# Altium PCB Advanced Clock.PcbDoc (part 4 of 7)
Units mil, origin at the board's own origin, x right, y up, seen from the top; angles counter-clockwise.
Board outline 3854 x 3880 mil, 2 copper layers (Top Layer, Bottom Layer); 117 components, 90 nets, 504 pads, 209 vias.
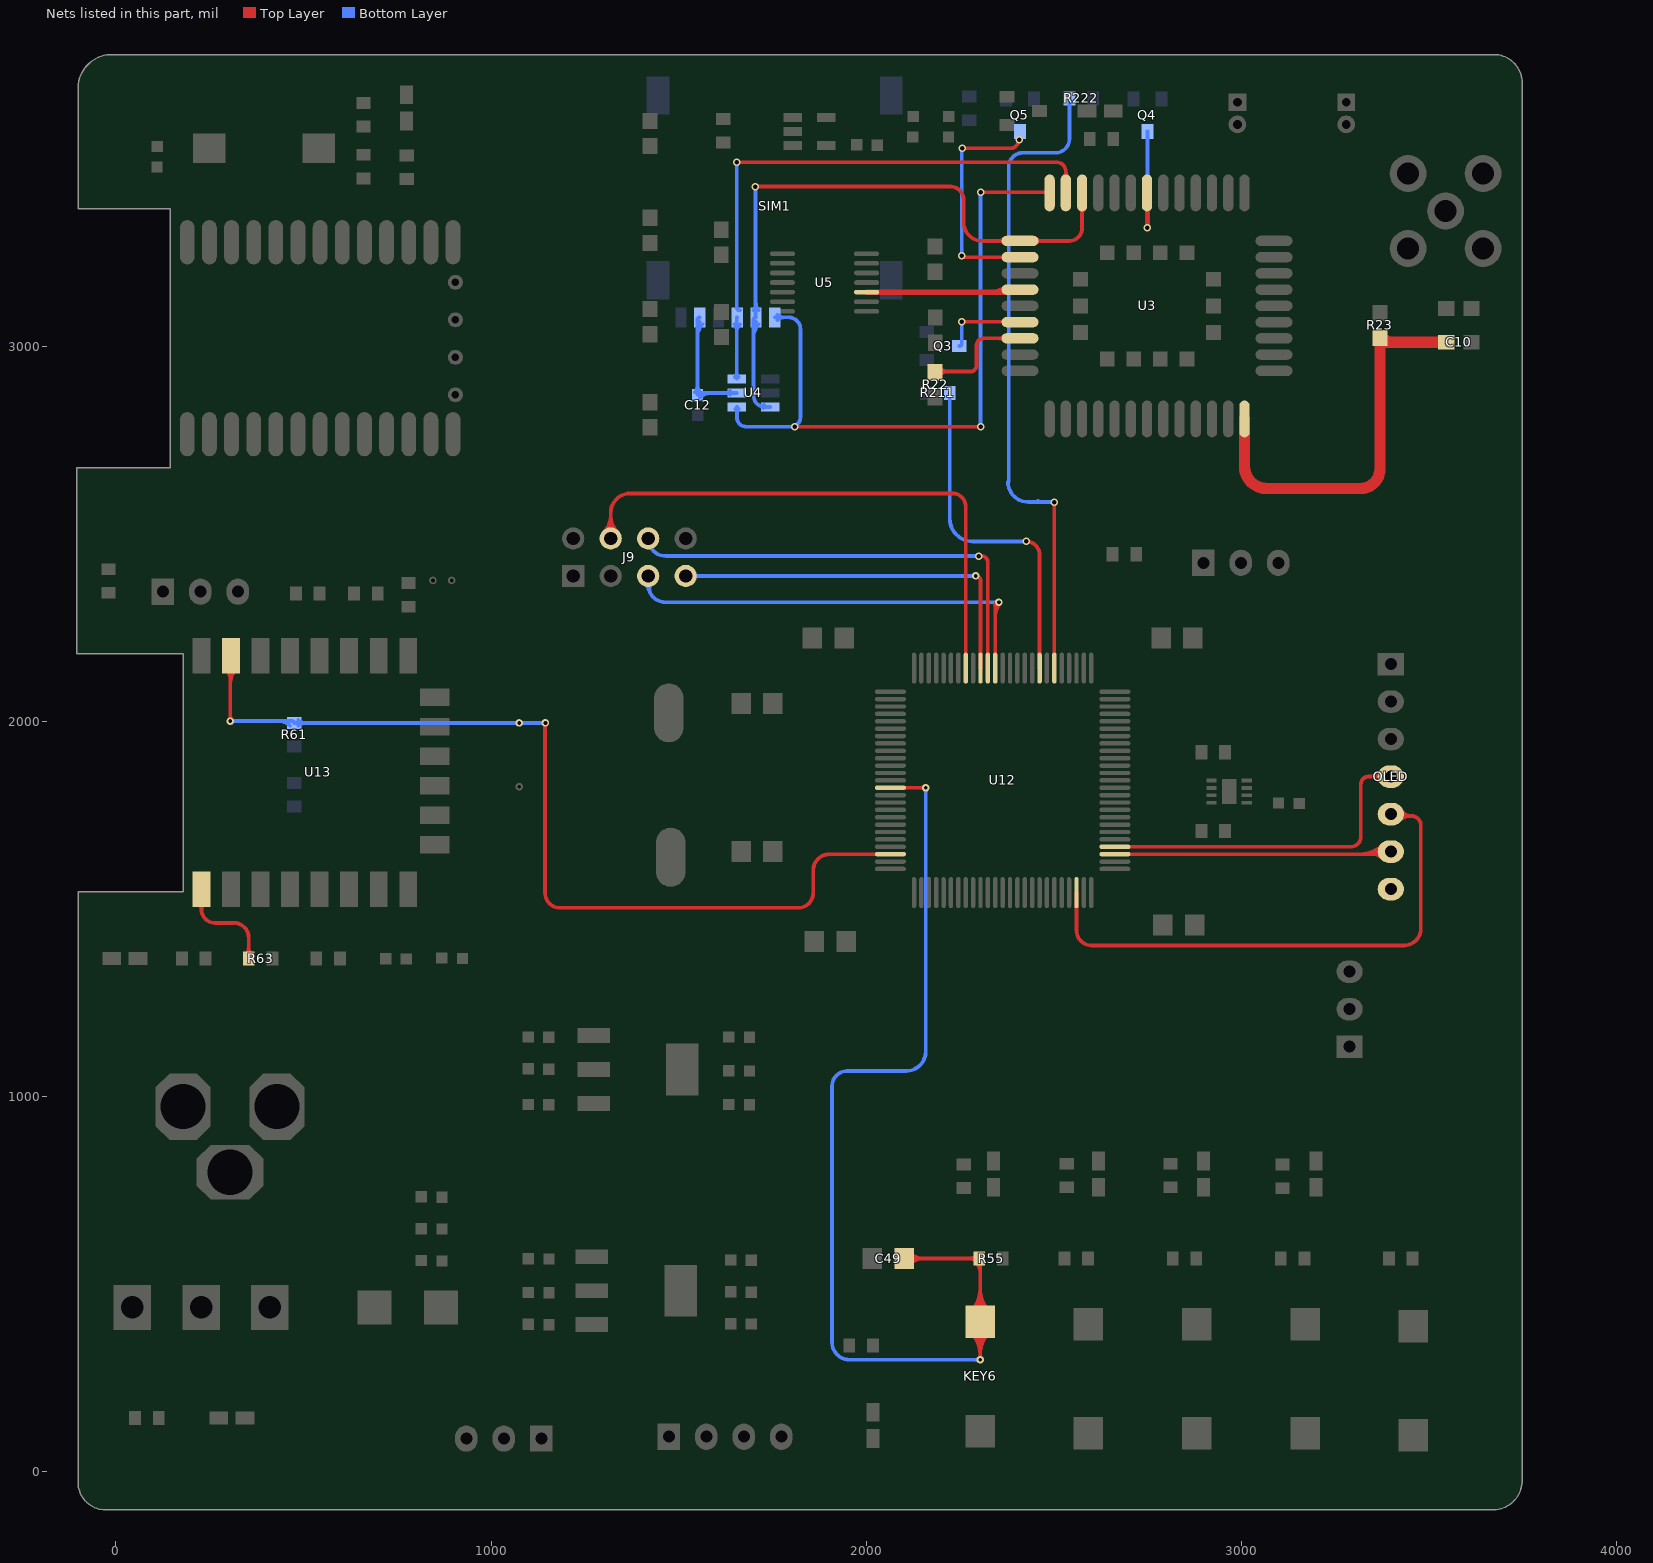
[diagram p4: the nets of this part, all layers, seen from the top]

## Via types
v1: diameter 20, hole 12, Top Layer to Bottom Layer, 133 vias
v2: diameter 20, hole 10, Top Layer to Bottom Layer, 30 vias
v3: diameter 15, hole 7, Top Layer to Bottom Layer, 26 vias
v4: diameter 30, hole 20, Top Layer to Bottom Layer, 11 vias
v5: diameter 138, hole 137.8, Top Layer to Bottom Layer, 4 vias
v6: diameter 50, hole 30, Top Layer to Bottom Layer, 4 vias
v7: diameter 40, hole 20, Top Layer to Bottom Layer, 1 vias

## Nets (pads, with @x,y where several pads share a name; then routed paths per layer and width w, separated by ;. In a path a pad name is that pad's centre, name@x,y a point inside that pad or via, vN(x,y) a via of type N, cw(c..) or ccw(c..) an arc to the next point about the centre after c; other vN are vias at no path point) (continued)
NRST: C49.2 KEY6.2 R55.1 U12.14 | length 6317
  Top Layer w10: U12.14@2064.79,1822.32 2159,1822.32 v2(2159,1822) ; C49.2@2101.5,567 R55.1@2301.5,567 ; v2(2304,297) KEY6.2@2304,398.34 R55.1@2304,564.5 ; C49.2@2109.28,559.22 cw(c2128.06,540.44) 2128.06,567 ; C49.2@2109.28,559.22 cw(c2128.06,540.44) 2128.06,567 ; C49.2@2109.28,559.22 cw(c2128.06,540.44) 2128.06,567 ; C49.2@2109.28,559.22 cw(c2128.06,540.44) 2128.06,567 ; C49.2@2109.28,559.22 cw(c2128.06,540.44) 2128.06,567 ; C49.2@2109.28,574.78 ccw(c2128.06,593.56) 2128.06,567 ; C49.2@2109.28,574.78 ccw(c2128.06,593.56) 2128.06,567 ; C49.2@2109.28,574.78 ccw(c2128.06,593.56) 2128.06,567 ; C49.2@2109.28,574.78 ccw(c2128.06,593.56) 2128.06,567 ; C49.2@2109.28,574.78 ccw(c2128.06,593.56) 2128.06,567 ; C49.2@2116.35,552.15 cw(c2152.2,516.3) 2152.2,567 ; C49.2@2116.35,552.15 cw(c2152.2,516.3) 2152.2,567 ; C49.2@2116.35,552.15 cw(c2152.2,516.3) 2152.2,567 ; C49.2@2116.35,552.15 cw(c2152.2,516.3) 2152.2,567 ; C49.2@2116.35,552.15 cw(c2152.2,516.3) 2152.2,567 ; C49.2@2116.35,581.85 ccw(c2152.2,617.7) 2152.2,567 ; C49.2@2116.35,581.85 ccw(c2152.2,617.7) 2152.2,567 ; C49.2@2116.35,581.85 ccw(c2152.2,617.7) 2152.2,567 ; C49.2@2116.35,581.85 ccw(c2152.2,617.7) 2152.2,567 ; C49.2@2116.35,581.85 ccw(c2152.2,617.7) 2152.2,567 ; 2146.17,1822.32 cw(c2146.17,1809.17) v2@2155.46,1818.46 ; 2146.17,1822.32 cw(c2146.17,1809.17) v2@2155.46,1818.46 ; 2146.17,1822.32 cw(c2146.17,1809.17) v2@2155.46,1818.46 ; 2146.17,1822.32 cw(c2146.17,1809.17) v2@2155.46,1818.46 ; 2146.17,1822.32 cw(c2146.17,1809.17) v2@2155.46,1818.46 ; 2146.17,1822.32 cw(c2146.17,1809.17) v2@2155.46,1818.46 ; 2146.17,1822.32 cw(c2146.17,1809.17) v2@2155.46,1818.46 ; 2146.17,1822.32 cw(c2146.17,1809.17) v2@2155.46,1818.46 ; 2147.69,1822.31 ccw(c2147.69,1833.31) v2@2155.46,1825.54 ; 2147.69,1822.31 ccw(c2147.69,1833.31) v2@2155.46,1825.54 ; 2147.69,1822.31 ccw(c2147.69,1833.31) v2@2155.46,1825.54 ; 2147.69,1822.31 ccw(c2147.69,1833.31) v2@2155.46,1825.54 ; 2147.69,1822.31 ccw(c2147.69,1833.31) v2@2155.46,1825.54 ; 2147.69,1822.31 ccw(c2147.69,1833.31) v2@2155.46,1825.54 ; 2147.69,1822.31 ccw(c2147.69,1833.31) v2@2155.46,1825.54 ; 2147.69,1822.31 ccw(c2147.69,1833.31) v2@2155.46,1825.54 ; 2275.55,567 cw(c2275.55,541.05) R55.1@2293.9,559.4 ; 2275.55,567 ccw(c2275.55,592.95) R55.1@2293.9,574.6 ; 2275.55,567 cw(c2275.55,541.05) R55.1@2293.9,559.4 ; 2275.55,567 ccw(c2275.55,592.95) R55.1@2293.9,574.6 ; 2275.55,567 cw(c2275.55,541.05) R55.1@2293.9,559.4 ; 2275.55,567 ccw(c2275.55,592.95) R55.1@2293.9,574.6 ; KEY6.2@2279.7,370.1 cw(c2221.02,311.42) 2304,311.42 ; KEY6.2@2279.7,370.1 cw(c2221.02,311.42) 2304,311.42 ; KEY6.2@2279.7,370.1 cw(c2221.02,311.42) 2304,311.42 ; KEY6.2@2279.7,370.1 cw(c2221.02,311.42) 2304,311.42 ; KEY6.2@2279.7,370.1 cw(c2221.02,311.42) 2304,311.42 ; KEY6.2@2279.7,426.58 ccw(c2221.02,485.25) 2304,485.25 ; KEY6.2@2279.7,426.58 ccw(c2221.02,485.25) 2304,485.25 ; KEY6.2@2279.7,426.58 ccw(c2221.02,485.25) 2304,485.25 ; KEY6.2@2279.7,426.58 ccw(c2221.02,485.25) 2304,485.25 ; KEY6.2@2279.7,426.58 ccw(c2221.02,485.25) 2304,485.25 ; KEY6.2@2286.77,377.17 cw(c2245.17,335.57) 2304,335.57 ; KEY6.2@2286.77,377.17 cw(c2245.17,335.57) 2304,335.57 ; KEY6.2@2286.77,377.17 cw(c2245.17,335.57) 2304,335.57 ; KEY6.2@2286.77,377.17 cw(c2245.17,335.57) 2304,335.57 ; KEY6.2@2286.77,377.17 cw(c2245.17,335.57) 2304,335.57 ; KEY6.2@2286.77,419.51 ccw(c2245.17,461.11) 2304,461.11 ; KEY6.2@2286.77,419.51 ccw(c2245.17,461.11) 2304,461.11 ; KEY6.2@2286.77,419.51 ccw(c2245.17,461.11) 2304,461.11 ; KEY6.2@2286.77,419.51 ccw(c2245.17,461.11) 2304,461.11 ; KEY6.2@2286.77,419.51 ccw(c2245.17,461.11) 2304,461.11 ; v2@2300.46,300.54 ccw(c2291.93,309.07) 2304,309.07 ; v2@2300.46,300.54 ccw(c2291.93,309.07) 2304,309.07 ; v2@2300.46,300.54 ccw(c2291.93,309.07) 2304,309.07 ; v2@2300.46,300.54 ccw(c2291.93,309.07) 2304,309.07 ; v2@2300.46,300.54 ccw(c2291.93,309.07) 2304,309.07 ; v2@2300.46,300.54 ccw(c2291.93,309.07) 2304,309.07 ; v2@2300.46,300.54 ccw(c2291.93,309.07) 2304,309.07 ; v2@2300.46,300.54 ccw(c2291.93,309.07) 2304,309.07 ; 2304,309.07 ccw(c2316.07,309.07) v2@2307.54,300.54 ; 2304,309.07 ccw(c2316.07,309.07) v2@2307.54,300.54 ; 2304,309.07 ccw(c2316.07,309.07) v2@2307.54,300.54 ; 2304,309.07 ccw(c2316.07,309.07) v2@2307.54,300.54 ; 2304,309.07 ccw(c2316.07,309.07) v2@2307.54,300.54 ; 2304,309.07 ccw(c2316.07,309.07) v2@2307.54,300.54 ; 2304,309.07 ccw(c2316.07,309.07) v2@2307.54,300.54 ; 2304,309.07 ccw(c2316.07,309.07) v2@2307.54,300.54 ; 2304,311.42 cw(c2386.98,311.42) KEY6.2@2328.3,370.1 ; 2304,311.42 cw(c2386.98,311.42) KEY6.2@2328.3,370.1 ; 2304,311.42 cw(c2386.98,311.42) KEY6.2@2328.3,370.1 ; 2304,311.42 cw(c2386.98,311.42) KEY6.2@2328.3,370.1 ; 2304,311.42 cw(c2386.98,311.42) KEY6.2@2328.3,370.1 ; 2304,335.57 cw(c2362.83,335.57) KEY6.2@2321.23,377.17 ; 2304,335.57 cw(c2362.83,335.57) KEY6.2@2321.23,377.17 ; 2304,335.57 cw(c2362.83,335.57) KEY6.2@2321.23,377.17 ; 2304,335.57 cw(c2362.83,335.57) KEY6.2@2321.23,377.17 ; 2304,335.57 cw(c2362.83,335.57) KEY6.2@2321.23,377.17 ; 2304,461.11 ccw(c2362.83,461.11) KEY6.2@2321.23,419.51 ; 2304,461.11 ccw(c2362.83,461.11) KEY6.2@2321.23,419.51 ; 2304,461.11 ccw(c2362.83,461.11) KEY6.2@2321.23,419.51 ; 2304,461.11 ccw(c2362.83,461.11) KEY6.2@2321.23,419.51 ; 2304,461.11 ccw(c2362.83,461.11) KEY6.2@2321.23,419.51 ; 2304,485.25 ccw(c2386.98,485.25) KEY6.2@2328.3,426.58 ; 2304,485.25 ccw(c2386.98,485.25) KEY6.2@2328.3,426.58 ; 2304,485.25 ccw(c2386.98,485.25) KEY6.2@2328.3,426.58 ; 2304,485.25 ccw(c2386.98,485.25) KEY6.2@2328.3,426.58 ; 2304,485.25 ccw(c2386.98,485.25) KEY6.2@2328.3,426.58 ; R55.1@2293.9,556.15 cw(c2269.52,531.77) 2304,531.77 ccw(c2269.52,531.77) R55.1@2293.9,556.15 ; 2304,543.84 cw(c2321.41,543.84) 2309.1,556.15 ccw(c2321.41,543.84) 2304,543.84
  Bottom Layer w10: v2(2159,1822) 2159,1119.35 cw(c2106.65,1119.35) 2106.65,1067 1949,1067 ccw(c1949,1027) 1909,1027 1909,344.33 ccw(c1956.33,344.33) 1956.33,297 v2(2304,297) ; v2@2155.46,1818.46 cw(c2146.93,1809.93) 2159,1809.93 ; v2@2155.46,1818.46 cw(c2146.93,1809.93) 2159,1809.93 ; v2@2155.46,1818.46 cw(c2146.93,1809.93) 2159,1809.93 ; v2@2155.46,1818.46 cw(c2146.93,1809.93) 2159,1809.93 ; v2@2155.46,1818.46 cw(c2146.93,1809.93) 2159,1809.93 ; v2@2155.46,1818.46 cw(c2146.93,1809.93) 2159,1809.93 ; v2@2155.46,1818.46 cw(c2146.93,1809.93) 2159,1809.93 ; v2@2155.46,1818.46 cw(c2146.93,1809.93) 2159,1809.93 ; 2159,1809.93 cw(c2171.07,1809.93) v2@2162.54,1818.46 ; 2159,1809.93 cw(c2171.07,1809.93) v2@2162.54,1818.46 ; 2159,1809.93 cw(c2171.07,1809.93) v2@2162.54,1818.46 ; 2159,1809.93 cw(c2171.07,1809.93) v2@2162.54,1818.46 ; 2159,1809.93 cw(c2171.07,1809.93) v2@2162.54,1818.46 ; 2159,1809.93 cw(c2171.07,1809.93) v2@2162.54,1818.46 ; 2159,1809.93 cw(c2171.07,1809.93) v2@2162.54,1818.46 ; 2159,1809.93 cw(c2171.07,1809.93) v2@2162.54,1818.46 ; 2291.93,297 cw(c2291.93,284.93) v2@2300.46,293.46 ; 2291.93,297 ccw(c2291.93,309.07) v2@2300.46,300.54 ; 2291.93,297 cw(c2291.93,284.93) v2@2300.46,293.46 ; 2291.93,297 ccw(c2291.93,309.07) v2@2300.46,300.54 ; 2291.93,297 cw(c2291.93,284.93) v2@2300.46,293.46 ; 2291.93,297 ccw(c2291.93,309.07) v2@2300.46,300.54 ; 2291.93,297 cw(c2291.93,284.93) v2@2300.46,293.46 ; 2291.93,297 ccw(c2291.93,309.07) v2@2300.46,300.54 ; 2291.93,297 cw(c2291.93,284.93) v2@2300.46,293.46 ; 2291.93,297 ccw(c2291.93,309.07) v2@2300.46,300.54 ; 2291.93,297 cw(c2291.93,284.93) v2@2300.46,293.46 ; 2291.93,297 ccw(c2291.93,309.07) v2@2300.46,300.54 ; 2291.93,297 cw(c2291.93,284.93) v2@2300.46,293.46 ; 2291.93,297 ccw(c2291.93,309.07) v2@2300.46,300.54 ; 2291.93,297 cw(c2291.93,284.93) v2@2300.46,293.46 ; 2291.93,297 ccw(c2291.93,309.07) v2@2300.46,300.54
OLED_RES: OLED.5 U12.48 | length 1903.8
  Top Layer w10: U12.48@2560.85,1542.79 2560.85,1442 ccw(c2600.85,1442) 2600.85,1402 3434,1402 ccw(c3434,1447) 3479,1447 3479,1722 ccw(c3454,1722) 3454,1747 ; OLED.5@3399,1752 ccw(c3404,1752) 3404,1747 3454,1747 ; OLED.5@3417.24,1759.06 ccw(c3437.33,1769.78) 3437.33,1747 ; OLED.5@3417.24,1759.06 ccw(c3437.33,1769.78) 3437.33,1747 ; OLED.5@3417.24,1759.06 ccw(c3437.33,1769.78) 3437.33,1747 ; OLED.5@3417.24,1759.06 ccw(c3437.33,1769.78) 3437.33,1747 ; OLED.5@3417.24,1759.06 ccw(c3437.33,1769.78) 3437.33,1747 ; OLED.5@3421.68,1734.32 cw(c3452.28,1703.72) 3452.28,1747 ; OLED.5@3421.68,1734.32 cw(c3452.28,1703.72) 3452.28,1747 ; OLED.5@3421.68,1734.32 cw(c3452.28,1703.72) 3452.28,1747 ; OLED.5@3421.68,1734.32 cw(c3452.28,1703.72) 3452.28,1747 ; OLED.5@3421.68,1734.32 cw(c3452.28,1703.72) 3452.28,1747 ; OLED.5@3426.06,1763.76 ccw(c3454,1778.66) 3454,1747 ; OLED.5@3426.06,1763.76 ccw(c3454,1778.66) 3454,1747 ; OLED.5@3426.06,1763.76 ccw(c3454,1778.66) 3454,1747 ; OLED.5@3426.06,1763.76 ccw(c3454,1778.66) 3454,1747 ; OLED.5@3426.06,1763.76 ccw(c3454,1778.66) 3454,1747
PSM_EINT: R211.2 U12.83 | length 931.8
  Top Layer w10: v1(2427,2479) cw(c2427,2443.57) 2462.43,2443.57 U12.83@2462.43,2141.21
  Bottom Layer w10: R211.2@2222.99,2875 2222.99,2540.01 ccw(c2284,2540.01) 2284,2479 v1(2427,2479)
PSM_EINT_BC26: Q3.3 U3.19 | length 225
  Top Layer w10: v1(2255,3065) 2409.11,3065 cw(c2409.11,3063.69) U3.19@2410.42,3063.69
  Bottom Layer w10: Q3.3@2248.31,3000 ccw(c2248.31,3006.69) 2255,3006.69 v1(2255,3065)
PWR_KEY: R222.2 U12.81 | length 1753.4
  Top Layer w10: U12.81@2501.8,2141.21 v1@2501.8,2583.2
  Bottom Layer w10: 2378,2638 ccw(c2432,2638) 2432,2584 v1(2502,2584) ; 2380,2638 2380,3477.38 cw(c2417.62,3477.38) 2417.62,3515 2504.71,3515 ccw(c2504.71,3552.3) 2542.01,3552.3 R222.2@2542.01,3660 ; 2458,2587 ccw(c2461,2587) 2461,2584
PWR_KEY_BC26: Q4.3 U3.7 | length 350.4
  Top Layer w10: U3.7@2749,3408.18 cw(c2749,3407.18) 2750,3407.18 v1(2750,3315)
  Bottom Layer w10: v1(2750,3315) Q4.3@2750,3571.69
RESET_BC26: Q5.3 U3.15 | length 611.3
  Top Layer w10: v1(2255,3240) ccw(c2258.08,3240) 2258.08,3236.92 U3.15@2410.42,3236.92 ccw(c2412.34,3236.92) U3.15@2412.34,3235 ; v1(2256,3527) 2384,3527 ccw(c2384,3550) v1@2407,3550
  Bottom Layer w10: v1(2255,3240) v1@2255,3527
  other v1: 2408,3550
REST: R63.1 U13.9 | length 874.6
  Top Layer w10: U13.9@227.82,1552.08 227.82,1498.18 ; R63.1@354,1367 354,1422 ccw(c314,1422) 314,1462 264,1462 cw(c264,1498.18) 227.82,1498.18 ; U13.9@219.42,1511.83 cw(c212.52,1498.18) 227.82,1498.18 ; U13.9@219.42,1511.83 cw(c212.52,1498.18) 227.82,1498.18 ; U13.9@219.42,1511.83 cw(c212.52,1498.18) 227.82,1498.18 ; U13.9@219.42,1511.83 cw(c212.52,1498.18) 227.82,1498.18 ; U13.9@219.42,1511.83 cw(c212.52,1498.18) 227.82,1498.18 ; U13.9@219.42,1511.83 cw(c212.52,1498.18) 227.82,1498.18 ; U13.9@219.42,1511.83 cw(c212.52,1498.18) 227.82,1498.18 ; U13.9@219.42,1511.83 cw(c212.52,1498.18) 227.82,1498.18 ; 227.82,1498.18 cw(c243.11,1498.18) U13.9@236.22,1511.83 ; 227.82,1498.18 cw(c243.11,1498.18) U13.9@236.22,1511.83 ; 227.82,1498.18 cw(c243.11,1498.18) U13.9@236.22,1511.83 ; 227.82,1498.18 cw(c243.11,1498.18) U13.9@236.22,1511.83 ; 227.82,1498.18 cw(c243.11,1498.18) U13.9@236.22,1511.83 ; 227.82,1498.18 cw(c243.11,1498.18) U13.9@236.22,1511.83 ; 227.82,1498.18 cw(c243.11,1498.18) U13.9@236.22,1511.83 ; 227.82,1498.18 cw(c243.11,1498.18) U13.9@236.22,1511.83 ; R63.1@346.4,1377.85 ccw(c328.05,1396.2) 354,1396.2 ; R63.1@346.4,1377.85 ccw(c328.05,1396.2) 354,1396.2 ; R63.1@346.4,1377.85 ccw(c328.05,1396.2) 354,1396.2 ; R63.1@346.4,1377.85 ccw(c328.05,1396.2) 354,1396.2 ; R63.1@346.4,1377.85 ccw(c328.05,1396.2) 354,1396.2 ; R63.1@346.4,1377.85 ccw(c328.05,1396.2) 354,1396.2 ; R63.1@346.4,1377.85 ccw(c328.05,1396.2) 354,1396.2 ; R63.1@346.4,1377.85 ccw(c328.05,1396.2) 354,1396.2 ; 354,1396.2 ccw(c379.95,1396.2) R63.1@361.6,1377.85 ; 354,1396.2 ccw(c379.95,1396.2) R63.1@361.6,1377.85 ; 354,1396.2 ccw(c379.95,1396.2) R63.1@361.6,1377.85 ; 354,1396.2 ccw(c379.95,1396.2) R63.1@361.6,1377.85 ; 354,1396.2 ccw(c379.95,1396.2) R63.1@361.6,1377.85 ; 354,1396.2 ccw(c379.95,1396.2) R63.1@361.6,1377.85 ; 354,1396.2 ccw(c379.95,1396.2) R63.1@361.6,1377.85 ; 354,1396.2 ccw(c379.95,1396.2) R63.1@361.6,1377.85
RF_ANT: C10.2 R23.1 U3.35 | length 1442.8
  Top Layer w30: U3.35@3008.84,2805.82 3008.84,2679.03 ccw(c3067.87,2679.03) 3067.87,2620 3317.98,2620 ccw(c3317.98,2671.84) 3369.83,2671.84 R23.1@3369.83,3009.83 ; R23.1@3369.83,3021.25 ccw(c3381.25,3021.25) 3381.25,3009.83 C10.2@3546.82,3009.83 ; R23.1@3371.2,3014.8 cw(c3378.3,2991.62) 3390.42,3012.62 ; R23.1@3371.2,3014.8 cw(c3378.3,2991.62) 3390.42,3012.62 ; R23.1@3371.2,3014.8 cw(c3378.3,2991.62) 3390.42,3012.62 ; R23.1@3371.2,3014.8 cw(c3378.3,2991.62) 3390.42,3012.62 ; R23.1@3371.2,3014.8 cw(c3378.3,2991.62) 3390.42,3012.62 ; R23.1@3371.2,3014.8 cw(c3378.3,2991.62) 3390.42,3012.62 ; R23.1@3371.2,3014.8 cw(c3378.3,2991.62) 3390.42,3012.62 ; R23.1@3371.2,3014.8 cw(c3378.3,2991.62) 3390.42,3012.62 ; R23.1@3371.2,3014.8 cw(c3378.3,2991.62) 3390.42,3012.62 ; R23.1@3371.2,3014.8 cw(c3378.3,2991.62) 3390.42,3012.62 ; R23.1@3373.14,3022.6 ccw(c3403.97,3053.42) 3403.97,3009.83 ; R23.1@3373.14,3022.6 ccw(c3403.97,3053.42) 3403.97,3009.83 ; R23.1@3373.14,3022.6 ccw(c3403.97,3053.42) 3403.97,3009.83 ; R23.1@3373.14,3022.6 ccw(c3403.97,3053.42) 3403.97,3009.83 ; R23.1@3373.14,3022.6 ccw(c3403.97,3053.42) 3403.97,3009.83
RI_BC26: R22.2 U3.20 | length 745.9
  Top Layer w10: R22.2@2183.83,2930.18 cw(c2185.65,2930.18) 2185.65,2932 2279,2932 ccw(c2279,2947) 2294,2947 2294,3000.39 cw(c2314,3000.39) 2314,3020.39 U3.20@2410.42,3020.39 ; R22.2@2194.21,2921.76 cw(c2218.92,2897.05) 2218.92,2932 ; R22.2@2194.21,2921.76 cw(c2218.92,2897.05) 2218.92,2932 ; R22.2@2194.21,2921.76 cw(c2218.92,2897.05) 2218.92,2932 ; R22.2@2194.21,2921.76 cw(c2218.92,2897.05) 2218.92,2932 ; R22.2@2194.21,2921.76 cw(c2218.92,2897.05) 2218.92,2932 ; R22.2@2194.21,2942.53 ccw(c2219.63,2967.96) 2219.63,2932 ; R22.2@2194.21,2942.53 ccw(c2219.63,2967.96) 2219.63,2932 ; R22.2@2194.21,2942.53 ccw(c2219.63,2967.96) 2219.63,2932 ; R22.2@2194.21,2942.53 ccw(c2219.63,2967.96) 2219.63,2932 ; R22.2@2194.21,2942.53 ccw(c2219.63,2967.96) 2219.63,2932 ; 2353.79,3020.39 cw(c2353.79,2999.19) U3.20@2368.78,3014.18 ; 2353.79,3020.39 ccw(c2353.79,3041.58) U3.20@2368.78,3026.59 ; 2353.79,3020.39 cw(c2353.79,2999.19) U3.20@2368.78,3014.18 ; 2353.79,3020.39 ccw(c2353.79,3041.58) U3.20@2368.78,3026.59 ; 2353.79,3020.39 cw(c2353.79,2999.19) U3.20@2368.78,3014.18 ; 2353.79,3020.39 ccw(c2353.79,3041.58) U3.20@2368.78,3026.59 ; 2353.79,3020.39 cw(c2353.79,2999.19) U3.20@2368.78,3014.18 ; 2353.79,3020.39 ccw(c2353.79,3041.58) U3.20@2368.78,3026.59 ; 2353.79,3020.39 cw(c2353.79,2999.19) U3.20@2368.78,3014.18 ; 2353.79,3020.39 ccw(c2353.79,3041.58) U3.20@2368.78,3026.59
"RXD TTL": pad.0 R61.1 U12.23 U13.7 | length 4140.8
  Top Layer w7.87: U12.23@2063.82,1646.12 U12.23@2064.79,1645.15
  Top Layer w10: v2(305,2000) 305,2172.57 cw(c306.56,2172.57) U13.7@306.56,2174.13 ; v2(1145,1995) ccw(c1145,1994) 1144,1994 1144,1542 ccw(c1184,1542) 1184,1502 1819,1502 ccw(c1819,1542) 1859,1542 1859,1602 cw(c1902.15,1602) 1902.15,1645.15 U12.23@2064.79,1645.15 ; U13.7@293.39,2137.34 cw(c265.36,2109.31) 305,2109.31 ; U13.7@293.39,2137.34 cw(c265.36,2109.31) 305,2109.31 ; U13.7@293.39,2137.34 cw(c265.36,2109.31) 305,2109.31 ; U13.7@293.39,2137.34 cw(c265.36,2109.31) 305,2109.31 ; U13.7@293.39,2137.34 cw(c265.36,2109.31) 305,2109.31 ; v2@301.46,2003.54 ccw(c292.93,2012.07) 305,2012.07 ; v2@301.46,2003.54 ccw(c292.93,2012.07) 305,2012.07 ; v2@301.46,2003.54 ccw(c292.93,2012.07) 305,2012.07 ; v2@301.46,2003.54 ccw(c292.93,2012.07) 305,2012.07 ; v2@301.46,2003.54 ccw(c292.93,2012.07) 305,2012.07 ; v2@301.46,2003.54 ccw(c292.93,2012.07) 305,2012.07 ; v2@301.46,2003.54 ccw(c292.93,2012.07) 305,2012.07 ; v2@301.46,2003.54 ccw(c292.93,2012.07) 305,2012.07 ; 305,2012.07 ccw(c317.07,2012.07) v2@308.54,2003.54 ; 305,2012.07 ccw(c317.07,2012.07) v2@308.54,2003.54 ; 305,2012.07 ccw(c317.07,2012.07) v2@308.54,2003.54 ; 305,2012.07 ccw(c317.07,2012.07) v2@308.54,2003.54 ; 305,2012.07 ccw(c317.07,2012.07) v2@308.54,2003.54 ; 305,2012.07 ccw(c317.07,2012.07) v2@308.54,2003.54 ; 305,2012.07 ccw(c317.07,2012.07) v2@308.54,2003.54 ; 305,2012.07 ccw(c317.07,2012.07) v2@308.54,2003.54 ; 305,2101.79 cw(c355.28,2101.79) U13.7@319.73,2137.34 ; 305,2101.79 cw(c355.28,2101.79) U13.7@319.73,2137.34 ; 305,2101.79 cw(c355.28,2101.79) U13.7@319.73,2137.34 ; 305,2101.79 cw(c355.28,2101.79) U13.7@319.73,2137.34 ; 305,2101.79 cw(c355.28,2101.79) U13.7@319.73,2137.34 ; 305,2125.93 cw(c331.13,2125.93) U13.7@312.65,2144.41 ; 305,2125.93 cw(c331.13,2125.93) U13.7@312.65,2144.41 ; 305,2125.93 cw(c331.13,2125.93) U13.7@312.65,2144.41 ; 305,2125.93 cw(c331.13,2125.93) U13.7@312.65,2144.41 ; 305,2125.93 cw(c331.13,2125.93) U13.7@312.65,2144.41 ; 1144,1980.51 cw(c1159.49,1980.51) v2@1148.54,1991.46 ; 1144,1980.51 cw(c1159.49,1980.51) v2@1148.54,1991.46 ; 1144,1980.51 cw(c1159.49,1980.51) v2@1148.54,1991.46 ; 1144,1980.51 cw(c1159.49,1980.51) v2@1148.54,1991.46 ; 1144,1980.51 cw(c1159.49,1980.51) v2@1148.54,1991.46 ; 1144,1980.51 cw(c1159.49,1980.51) v2@1148.54,1991.46 ; 1144,1980.51 cw(c1159.49,1980.51) v2@1148.54,1991.46 ; 1144,1980.51 cw(c1159.49,1980.51) v2@1148.54,1991.46
  Bottom Layer w10: v2(305,2000) 470,2000 cw(c470,1995) R61.1@475,1995 v2(1145,1995) ; v2@308.54,1996.46 cw(c317.07,1987.93) 317.07,2000 ; v2@308.54,1996.46 cw(c317.07,1987.93) 317.07,2000 ; v2@308.54,1996.46 cw(c317.07,1987.93) 317.07,2000 ; v2@308.54,1996.46 cw(c317.07,1987.93) 317.07,2000 ; v2@308.54,1996.46 cw(c317.07,1987.93) 317.07,2000 ; v2@308.54,1996.46 cw(c317.07,1987.93) 317.07,2000 ; v2@308.54,1996.46 cw(c317.07,1987.93) 317.07,2000 ; v2@308.54,1996.46 cw(c317.07,1987.93) 317.07,2000 ; v2@308.54,2003.54 ccw(c317.07,2012.07) 317.07,2000 ; v2@308.54,2003.54 ccw(c317.07,2012.07) 317.07,2000 ; v2@308.54,2003.54 ccw(c317.07,2012.07) 317.07,2000 ; v2@308.54,2003.54 ccw(c317.07,2012.07) 317.07,2000 ; v2@308.54,2003.54 ccw(c317.07,2012.07) 317.07,2000 ; v2@308.54,2003.54 ccw(c317.07,2012.07) 317.07,2000 ; v2@308.54,2003.54 ccw(c317.07,2012.07) 317.07,2000 ; v2@308.54,2003.54 ccw(c317.07,2012.07) 317.07,2000 ; 433.73,2000 cw(c433.73,1956.98) R61.1@464.15,1987.4 ; 433.73,2000 cw(c433.73,1956.98) R61.1@464.15,1987.4 ; 433.73,2000 cw(c433.73,1956.98) R61.1@464.15,1987.4 ; 433.73,2000 cw(c433.73,1956.98) R61.1@464.15,1987.4 ; 433.73,2000 cw(c433.73,1956.98) R61.1@464.15,1987.4 ; R61.1@485.85,1987.4 cw(c504.2,1969.05) 504.2,1995 ; R61.1@485.85,1987.4 cw(c504.2,1969.05) 504.2,1995 ; R61.1@485.85,1987.4 cw(c504.2,1969.05) 504.2,1995 ; R61.1@485.85,1987.4 cw(c504.2,1969.05) 504.2,1995 ; R61.1@485.85,1987.4 cw(c504.2,1969.05) 504.2,1995 ; R61.1@485.85,1987.4 cw(c504.2,1969.05) 504.2,1995 ; R61.1@485.85,1987.4 cw(c504.2,1969.05) 504.2,1995 ; R61.1@485.85,1987.4 cw(c504.2,1969.05) 504.2,1995 ; R61.1@485.85,2002.6 ccw(c504.2,2020.95) 504.2,1995 ; R61.1@485.85,2002.6 ccw(c504.2,2020.95) 504.2,1995 ; R61.1@485.85,2002.6 ccw(c504.2,2020.95) 504.2,1995 ; R61.1@485.85,2002.6 ccw(c504.2,2020.95) 504.2,1995 ; R61.1@485.85,2002.6 ccw(c504.2,2020.95) 504.2,1995 ; R61.1@485.85,2002.6 ccw(c504.2,2020.95) 504.2,1995 ; R61.1@485.85,2002.6 ccw(c504.2,2020.95) 504.2,1995 ; R61.1@485.85,2002.6 ccw(c504.2,2020.95) 504.2,1995 ; 1062.93,1995 cw(c1062.93,1982.93) pad.0@1071.46,1991.46 ; 1062.93,1995 ccw(c1062.93,2007.07) pad.0@1071.46,1998.54 ; 1062.93,1995 cw(c1062.93,1982.93) pad.0@1071.46,1991.46 ; 1062.93,1995 ccw(c1062.93,2007.07) pad.0@1071.46,1998.54 ; 1062.93,1995 cw(c1062.93,1982.93) pad.0@1071.46,1991.46 ; 1062.93,1995 ccw(c1062.93,2007.07) pad.0@1071.46,1998.54 ; pad.0@1078.54,1991.46 cw(c1087.07,1982.93) 1087.07,1995 ; pad.0@1078.54,1991.46 cw(c1087.07,1982.93) 1087.07,1995 ; pad.0@1078.54,1991.46 cw(c1087.07,1982.93) 1087.07,1995 ; pad.0@1078.54,1998.54 ccw(c1087.07,2007.07) 1087.07,1995 ; pad.0@1078.54,1998.54 ccw(c1087.07,2007.07) 1087.07,1995 ; pad.0@1078.54,1998.54 ccw(c1087.07,2007.07) 1087.07,1995 ; 1132.93,1995 cw(c1132.93,1982.93) v2@1141.46,1991.46 ; 1132.93,1995 ccw(c1132.93,2007.07) v2@1141.46,1998.54 ; 1132.93,1995 cw(c1132.93,1982.93) v2@1141.46,1991.46 ; 1132.93,1995 ccw(c1132.93,2007.07) v2@1141.46,1998.54 ; 1132.93,1995 cw(c1132.93,1982.93) v2@1141.46,1991.46 ; 1132.93,1995 ccw(c1132.93,2007.07) v2@1141.46,1998.54 ; 1132.93,1995 cw(c1132.93,1982.93) v2@1141.46,1991.46 ; 1132.93,1995 ccw(c1132.93,2007.07) v2@1141.46,1998.54 ; 1132.93,1995 cw(c1132.93,1982.93) v2@1141.46,1991.46 ; 1132.93,1995 ccw(c1132.93,2007.07) v2@1141.46,1998.54 ; 1132.93,1995 cw(c1132.93,1982.93) v2@1141.46,1991.46 ; 1132.93,1995 ccw(c1132.93,2007.07) v2@1141.46,1998.54 ; 1132.93,1995 cw(c1132.93,1982.93) v2@1141.46,1991.46 ; 1132.93,1995 ccw(c1132.93,2007.07) v2@1141.46,1998.54 ; 1132.93,1995 cw(c1132.93,1982.93) v2@1141.46,1991.46 ; 1132.93,1995 ccw(c1132.93,2007.07) v2@1141.46,1998.54
RXD_BC26: U3.17 U5.3 | length 716.6
  Top Layer w10: U3.17@2403.72,3143.61 ccw(c2403.72,3150.31) U3.17@2410.42,3150.31
  Top Layer w15: U5.3@2001.2,3143.61 U3.17@2403.72,3143.61 ; 2343.67,3143.61 ccw(c2343.67,3181.63) U3.17@2370.54,3154.75 ; 2343.67,3143.61 ccw(c2343.67,3181.63) U3.17@2370.54,3154.75 ; 2343.67,3143.61 ccw(c2343.67,3181.63) U3.17@2370.54,3154.75 ; 2343.67,3143.61 ccw(c2343.67,3181.63) U3.17@2370.54,3154.75 ; 2343.67,3143.61 ccw(c2343.67,3181.63) U3.17@2370.54,3154.75 ; 2356.54,3146.66 cw(c2362.9,3135.64) U3.17@2370.99,3145.46 ; 2356.54,3146.66 cw(c2362.9,3135.64) U3.17@2370.99,3145.46 ; 2356.54,3146.66 cw(c2362.9,3135.64) U3.17@2370.99,3145.46 ; 2356.54,3146.66 cw(c2362.9,3135.64) U3.17@2370.99,3145.46 ; 2356.54,3146.66 cw(c2362.9,3135.64) U3.17@2370.99,3145.46 ; 2356.54,3146.66 cw(c2362.9,3135.64) U3.17@2370.99,3145.46 ; 2356.54,3146.66 cw(c2362.9,3135.64) U3.17@2370.99,3145.46 ; 2356.54,3146.66 cw(c2362.9,3135.64) U3.17@2370.99,3145.46 ; 2356.54,3146.66 cw(c2362.9,3135.64) U3.17@2370.99,3145.46 ; 2356.54,3146.66 cw(c2362.9,3135.64) U3.17@2370.99,3145.46
SIM_CLK: SIM1.3 U3.13 U4.4 | length 2343.9
  Top Layer w10: v1(1810,2785) v1(2305,2785) ; v1(2305,3410) U3.13@2478.56,3410
  Bottom Layer w10: U4.4@1655.71,2837.6 1655.71,2809.29 ccw(c1680,2809.29) 1680,2785 1800,2785 ccw(c1800,2810) 1825,2810 1825,3045 ccw(c1793.62,3045) 1793.62,3076.38 SIM1.3@1756.42,3076.38 ; v1@2305,2786.88 v1@2305,3405 ; U4.4@1650.89,2832.78 cw(c1639.27,2821.16) 1655.71,2821.16 ; U4.4@1650.89,2832.78 cw(c1639.27,2821.16) 1655.71,2821.16 ; U4.4@1650.89,2832.78 cw(c1639.27,2821.16) 1655.71,2821.16 ; U4.4@1650.89,2832.78 cw(c1639.27,2821.16) 1655.71,2821.16 ; U4.4@1650.89,2832.78 cw(c1639.27,2821.16) 1655.71,2821.16 ; U4.4@1650.89,2832.78 cw(c1639.27,2821.16) 1655.71,2821.16 ; U4.4@1650.89,2832.78 cw(c1639.27,2821.16) 1655.71,2821.16 ; U4.4@1650.89,2832.78 cw(c1639.27,2821.16) 1655.71,2821.16 ; 1655.71,2821.16 cw(c1672.15,2821.16) U4.4@1660.52,2832.78 ; 1655.71,2821.16 cw(c1672.15,2821.16) U4.4@1660.52,2832.78 ; 1655.71,2821.16 cw(c1672.15,2821.16) U4.4@1660.52,2832.78 ; 1655.71,2821.16 cw(c1672.15,2821.16) U4.4@1660.52,2832.78 ; 1655.71,2821.16 cw(c1672.15,2821.16) U4.4@1660.52,2832.78 ; 1655.71,2821.16 cw(c1672.15,2821.16) U4.4@1660.52,2832.78 ; 1655.71,2821.16 cw(c1672.15,2821.16) U4.4@1660.52,2832.78 ; 1655.71,2821.16 cw(c1672.15,2821.16) U4.4@1660.52,2832.78 ; SIM1.3@1763.49,3069.31 cw(c1780.56,3052.24) 1780.56,3076.38 ; SIM1.3@1763.49,3069.31 cw(c1780.56,3052.24) 1780.56,3076.38 ; SIM1.3@1763.49,3069.31 cw(c1780.56,3052.24) 1780.56,3076.38 ; SIM1.3@1763.49,3069.31 cw(c1780.56,3052.24) 1780.56,3076.38 ; SIM1.3@1763.49,3069.31 cw(c1780.56,3052.24) 1780.56,3076.38 ; SIM1.3@1763.49,3069.31 cw(c1780.56,3052.24) 1780.56,3076.38 ; SIM1.3@1763.49,3069.31 cw(c1780.56,3052.24) 1780.56,3076.38 ; SIM1.3@1763.49,3069.31 cw(c1780.56,3052.24) 1780.56,3076.38 ; SIM1.3@1763.49,3083.45 ccw(c1780.56,3100.52) 1780.56,3076.38 ; SIM1.3@1763.49,3083.45 ccw(c1780.56,3100.52) 1780.56,3076.38 ; SIM1.3@1763.49,3083.45 ccw(c1780.56,3100.52) 1780.56,3076.38 ; SIM1.3@1763.49,3083.45 ccw(c1780.56,3100.52) 1780.56,3076.38 ; SIM1.3@1763.49,3083.45 ccw(c1780.56,3100.52) 1780.56,3076.38 ; SIM1.3@1763.49,3083.45 ccw(c1780.56,3100.52) 1780.56,3076.38 ; SIM1.3@1763.49,3083.45 ccw(c1780.56,3100.52) 1780.56,3076.38 ; SIM1.3@1763.49,3083.45 ccw(c1780.56,3100.52) 1780.56,3076.38
SIM_DATA: SIM1.7 U3.11 U3.14 U4.3 | length 3087.7
  Top Layer w10: v1(1705,3425) 2225,3425 cw(c2225,3390) 2260,3390 2260,3330 ccw(c2309.77,3330) 2309.77,3280.23 2353.79,3280.23 ; U3.14@2410.42,3280.23 2542.17,3280.23 ccw(c2542.17,3313.83) 2575.77,3313.83 U3.11@2575.77,3408.18 ; 2353.79,3280.23 cw(c2353.79,3259.03) U3.14@2368.78,3274.02 ; 2353.79,3280.23 ccw(c2353.79,3301.42) U3.14@2368.78,3286.44 ; 2353.79,3280.23 cw(c2353.79,3259.03) U3.14@2368.78,3274.02 ; 2353.79,3280.23 ccw(c2353.79,3301.42) U3.14@2368.78,3286.44 ; 2353.79,3280.23 cw(c2353.79,3259.03) U3.14@2368.78,3274.02 ; 2353.79,3280.23 ccw(c2353.79,3301.42) U3.14@2368.78,3286.44 ; 2353.79,3280.23 cw(c2353.79,3259.03) U3.14@2368.78,3274.02 ; 2353.79,3280.23 ccw(c2353.79,3301.42) U3.14@2368.78,3286.44 ; 2353.79,3280.23 cw(c2353.79,3259.03) U3.14@2368.78,3274.02 ; 2353.79,3280.23 ccw(c2353.79,3301.42) U3.14@2368.78,3286.44 ; U3.14@2452.06,3274.02 cw(c2467.05,3259.03) 2467.05,3280.23 ; U3.14@2452.06,3274.02 cw(c2467.05,3259.03) 2467.05,3280.23 ; U3.14@2452.06,3274.02 cw(c2467.05,3259.03) 2467.05,3280.23 ; U3.14@2452.06,3274.02 cw(c2467.05,3259.03) 2467.05,3280.23 ; U3.14@2452.06,3274.02 cw(c2467.05,3259.03) 2467.05,3280.23 ; U3.14@2452.06,3286.44 ccw(c2467.05,3301.42) 2467.05,3280.23 ; U3.14@2452.06,3286.44 ccw(c2467.05,3301.42) 2467.05,3280.23 ; U3.14@2452.06,3286.44 ccw(c2467.05,3301.42) 2467.05,3280.23 ; U3.14@2452.06,3286.44 ccw(c2467.05,3301.42) 2467.05,3280.23 ; U3.14@2452.06,3286.44 ccw(c2467.05,3301.42) 2467.05,3280.23 ; U3.11@2569.56,3366.54 cw(c2554.58,3351.55) 2575.77,3351.55 ; U3.11@2569.56,3366.54 cw(c2554.58,3351.55) 2575.77,3351.55 ; U3.11@2569.56,3366.54 cw(c2554.58,3351.55) 2575.77,3351.55 ; U3.11@2569.56,3366.54 cw(c2554.58,3351.55) 2575.77,3351.55 ; U3.11@2569.56,3366.54 cw(c2554.58,3351.55) 2575.77,3351.55 ; 2575.77,3351.55 cw(c2596.97,3351.55) U3.11@2581.98,3366.54 ; 2575.77,3351.55 cw(c2596.97,3351.55) U3.11@2581.98,3366.54 ; 2575.77,3351.55 cw(c2596.97,3351.55) U3.11@2581.98,3366.54 ; 2575.77,3351.55 cw(c2596.97,3351.55) U3.11@2581.98,3366.54 ; 2575.77,3351.55 cw(c2596.97,3351.55) U3.11@2581.98,3366.54
  Bottom Layer w10: v1(1705,3425) 1705,3077.8 ccw(c1706.42,3077.8) SIM1.7@1706.42,3076.38 ccw(c1706.42,3069.96) 1700,3069.96 1700,2867.17 ccw(c1729.57,2867.17) 1729.57,2837.6 U4.3@1744.29,2837.6 ; SIM1.7@1699.35,3095.02 ccw(c1682.28,3112.09) 1706.42,3112.09 ; SIM1.7@1699.35,3095.02 ccw(c1682.28,3112.09) 1706.42,3112.09 ; SIM1.7@1699.35,3095.02 ccw(c1682.28,3112.09) 1706.42,3112.09 ; SIM1.7@1699.35,3095.02 ccw(c1682.28,3112.09) 1706.42,3112.09 ; SIM1.7@1699.35,3095.02 ccw(c1682.28,3112.09) 1706.42,3112.09 ; SIM1.7@1699.35,3095.02 ccw(c1682.28,3112.09) 1706.42,3112.09 ; SIM1.7@1699.35,3095.02 ccw(c1682.28,3112.09) 1706.42,3112.09 ; SIM1.7@1699.35,3095.02 ccw(c1682.28,3112.09) 1706.42,3112.09 ; 1700,3025.17 cw(c1746.05,3025.17) SIM1.7@1713.49,3057.73 ; 1700,3025.17 cw(c1746.05,3025.17) SIM1.7@1713.49,3057.73 ; 1700,3025.17 cw(c1746.05,3025.17) SIM1.7@1713.49,3057.73 ; 1700,3025.17 cw(c1746.05,3025.17) SIM1.7@1713.49,3057.73 ; 1700,3025.17 cw(c1746.05,3025.17) SIM1.7@1713.49,3057.73 ; 1700,3049.31 cw(c1721.91,3049.31) SIM1.7@1706.42,3064.8 ; 1700,3049.31 cw(c1721.91,3049.31) SIM1.7@1706.42,3064.8 ; 1700,3049.31 cw(c1721.91,3049.31) SIM1.7@1706.42,3064.8 ; 1700,3049.31 cw(c1721.91,3049.31) SIM1.7@1706.42,3064.8 ; 1700,3049.31 cw(c1721.91,3049.31) SIM1.7@1706.42,3064.8 ; SIM1.7@1700.92,3056.45 cw(c1694.93,3047.36) 1704.36,3041.92 ; SIM1.7@1700.92,3056.45 cw(c1694.93,3047.36) 1704.36,3041.92 ; SIM1.7@1700.92,3056.45 cw(c1694.93,3047.36) 1704.36,3041.92 ; SIM1.7@1700.92,3056.45 cw(c1694.93,3047.36) 1704.36,3041.92 ; SIM1.7@1700.92,3056.45 cw(c1694.93,3047.36) 1704.36,3041.92 ; SIM1.7@1700.92,3056.45 cw(c1694.93,3047.36) 1704.36,3041.92 ; SIM1.7@1700.92,3056.45 cw(c1694.93,3047.36) 1704.36,3041.92 ; SIM1.7@1700.92,3056.45 cw(c1694.93,3047.36) 1704.36,3041.92 ; SIM1.7@1700.92,3056.45 cw(c1694.93,3047.36) 1704.36,3041.92 ; SIM1.7@1700.92,3056.45 cw(c1694.93,3047.36) 1704.36,3041.92 ; 1706.42,3112.09 ccw(c1730.56,3112.09) SIM1.7@1713.49,3095.02 ; 1706.42,3112.09 ccw(c1730.56,3112.09) SIM1.7@1713.49,3095.02 ; 1706.42,3112.09 ccw(c1730.56,3112.09) SIM1.7@1713.49,3095.02 ; 1706.42,3112.09 ccw(c1730.56,3112.09) SIM1.7@1713.49,3095.02 ; 1706.42,3112.09 ccw(c1730.56,3112.09) SIM1.7@1713.49,3095.02 ; 1706.42,3112.09 ccw(c1730.56,3112.09) SIM1.7@1713.49,3095.02 ; 1706.42,3112.09 ccw(c1730.56,3112.09) SIM1.7@1713.49,3095.02 ; 1706.42,3112.09 ccw(c1730.56,3112.09) SIM1.7@1713.49,3095.02 ; 1715.62,2841.34 ccw(c1719.51,2855.85) U4.3@1727.76,2843.29 ; 1715.62,2841.34 ccw(c1719.51,2855.85) U4.3@1727.76,2843.29 ; 1715.62,2841.34 ccw(c1719.51,2855.85) U4.3@1727.76,2843.29 ; 1715.62,2841.34 ccw(c1719.51,2855.85) U4.3@1727.76,2843.29 ; 1715.62,2841.34 ccw(c1719.51,2855.85) U4.3@1727.76,2843.29 ; 1715.62,2841.34 ccw(c1719.51,2855.85) U4.3@1727.76,2843.29 ; 1715.62,2841.34 ccw(c1719.51,2855.85) U4.3@1727.76,2843.29 ; 1715.62,2841.34 ccw(c1719.51,2855.85) U4.3@1727.76,2843.29 ; 1716.65,2841.06 cw(c1712.83,2826.82) U4.3@1725.6,2834.19 ; 1716.65,2841.06 cw(c1712.83,2826.82) U4.3@1725.6,2834.19 ; 1716.65,2841.06 cw(c1712.83,2826.82) U4.3@1725.6,2834.19 ; 1716.65,2841.06 cw(c1712.83,2826.82) U4.3@1725.6,2834.19 ; 1716.65,2841.06 cw(c1712.83,2826.82) U4.3@1725.6,2834.19 ; 1716.65,2841.06 cw(c1712.83,2826.82) U4.3@1725.6,2834.19 ; 1716.65,2841.06 cw(c1712.83,2826.82) U4.3@1725.6,2834.19 ; 1716.65,2841.06 cw(c1712.83,2826.82) U4.3@1725.6,2834.19
SIM_RST: SIM1.2 U3.12 U4.6 | length 2175.9
  Top Layer w10: v1(1655,3490) 2507.27,3490 cw(c2507.27,3464.81) 2532.46,3464.81 ; U3.12@2532.46,3365.46 U3.12@2537.46,3408.18 ; U3.12@2526.26,3449.82 ccw(c2511.27,3464.81) 2532.46,3464.81 ; U3.12@2526.26,3449.82 ccw(c2511.27,3464.81) 2532.46,3464.81 ; U3.12@2526.26,3449.82 ccw(c2511.27,3464.81) 2532.46,3464.81 ; U3.12@2526.26,3449.82 ccw(c2511.27,3464.81) 2532.46,3464.81 ; U3.12@2526.26,3449.82 ccw(c2511.27,3464.81) 2532.46,3464.81 ; 2532.46,3464.81 ccw(c2553.66,3464.81) U3.12@2538.67,3449.82 ; 2532.46,3464.81 ccw(c2553.66,3464.81) U3.12@2538.67,3449.82 ; 2532.46,3464.81 ccw(c2553.66,3464.81) U3.12@2538.67,3449.82 ; 2532.46,3464.81 ccw(c2553.66,3464.81) U3.12@2538.67,3449.82 ; 2532.46,3464.81 ccw(c2553.66,3464.81) U3.12@2538.67,3449.82
  Bottom Layer w10: U4.6@1655,2912.4 1655,3074.96 cw(c1656.42,3074.96) SIM1.2@1656.42,3076.38 ; v1(1655,3490) 1655,3103.51 ccw(c1663.49,3103.51) SIM1.2@1663.49,3095.02 ; SIM1.2@1649.35,3057.73 cw(c1635.7,3044.08) 1655,3044.08 ; SIM1.2@1649.35,3057.73 cw(c1635.7,3044.08) 1655,3044.08 ; SIM1.2@1649.35,3057.73 cw(c1635.7,3044.08) 1655,3044.08 ; SIM1.2@1649.35,3057.73 cw(c1635.7,3044.08) 1655,3044.08 ; SIM1.2@1649.35,3057.73 cw(c1635.7,3044.08) 1655,3044.08 ; SIM1.2@1649.35,3057.73 cw(c1635.7,3044.08) 1655,3044.08 ; SIM1.2@1649.35,3057.73 cw(c1635.7,3044.08) 1655,3044.08 ; SIM1.2@1649.35,3057.73 cw(c1635.7,3044.08) 1655,3044.08 ; U4.6@1650.18,2917.22 ccw(c1638.56,2928.84) 1655,2928.84 ; U4.6@1650.18,2917.22 ccw(c1638.56,2928.84) 1655,2928.84 ; U4.6@1650.18,2917.22 ccw(c1638.56,2928.84) 1655,2928.84 ; U4.6@1650.18,2917.22 ccw(c1638.56,2928.84) 1655,2928.84 ; U4.6@1650.18,2917.22 ccw(c1638.56,2928.84) 1655,2928.84 ; U4.6@1650.18,2917.22 ccw(c1638.56,2928.84) 1655,2928.84 ; U4.6@1650.18,2917.22 ccw(c1638.56,2928.84) 1655,2928.84 ; U4.6@1650.18,2917.22 ccw(c1638.56,2928.84) 1655,2928.84 ; 1655,2928.84 ccw(c1671.44,2928.84) U4.6@1659.82,2917.22 ; 1655,2928.84 ccw(c1671.44,2928.84) U4.6@1659.82,2917.22 ; 1655,2928.84 ccw(c1671.44,2928.84) U4.6@1659.82,2917.22 ; 1655,2928.84 ccw(c1671.44,2928.84) U4.6@1659.82,2917.22 ; 1655,2928.84 ccw(c1671.44,2928.84) U4.6@1659.82,2917.22 ; 1655,2928.84 ccw(c1671.44,2928.84) U4.6@1659.82,2917.22 ; 1655,2928.84 ccw(c1671.44,2928.84) U4.6@1659.82,2917.22 ; 1655,2928.84 ccw(c1671.44,2928.84) U4.6@1659.82,2917.22 ; 1655,3037.24 cw(c1683.98,3037.24) SIM1.2@1663.49,3057.73 ; 1655,3037.24 cw(c1683.98,3037.24) SIM1.2@1663.49,3057.73 ; 1655,3037.24 cw(c1683.98,3037.24) SIM1.2@1663.49,3057.73 ; 1655,3037.24 cw(c1683.98,3037.24) SIM1.2@1663.49,3057.73 ; 1655,3037.24 cw(c1683.98,3037.24) SIM1.2@1663.49,3057.73 ; 1655,3037.24 cw(c1683.98,3037.24) SIM1.2@1663.49,3057.73 ; 1655,3037.24 cw(c1683.98,3037.24) SIM1.2@1663.49,3057.73 ; 1655,3037.24 cw(c1683.98,3037.24) SIM1.2@1663.49,3057.73
SIM_VDD: C12.1 SIM1.1 U4.5 | length 1846.1
  Bottom Layer w10: SIM1.1@1556.42,3076.38 ccw(c1556.42,3070.32) 1550.35,3070.32 C12.1@1550.35,2869.79 cw(c1555.57,2869.79) 1555.57,2875 U4.5@1655,2875 ; C12.1@1543.28,2876.86 ccw(c1526.21,2893.93) 1550.35,2893.93 ; C12.1@1543.28,2876.86 ccw(c1526.21,2893.93) 1550.35,2893.93 ; C12.1@1543.28,2876.86 ccw(c1526.21,2893.93) 1550.35,2893.93 ; C12.1@1543.28,2876.86 ccw(c1526.21,2893.93) 1550.35,2893.93 ; C12.1@1543.28,2876.86 ccw(c1526.21,2893.93) 1550.35,2893.93 ; C12.1@1543.28,2876.86 ccw(c1526.21,2893.93) 1550.35,2893.93 ; C12.1@1543.28,2876.86 ccw(c1526.21,2893.93) 1550.35,2893.93 ; C12.1@1543.28,2876.86 ccw(c1526.21,2893.93) 1550.35,2893.93 ; 1550.35,2893.93 ccw(c1574.5,2893.93) C12.1@1557.43,2876.86 ; 1550.35,2893.93 ccw(c1574.5,2893.93) C12.1@1557.43,2876.86 ; 1550.35,2893.93 ccw(c1574.5,2893.93) C12.1@1557.43,2876.86 ; 1550.35,2893.93 ccw(c1574.5,2893.93) C12.1@1557.43,2876.86 ; 1550.35,2893.93 ccw(c1574.5,2893.93) C12.1@1557.43,2876.86 ; 1550.35,2893.93 ccw(c1574.5,2893.93) C12.1@1557.43,2876.86 ; 1550.35,2893.93 ccw(c1574.5,2893.93) C12.1@1557.43,2876.86 ; 1550.35,2893.93 ccw(c1574.5,2893.93) C12.1@1557.43,2876.86 ; 1550.35,3026.02 cw(c1595.2,3026.02) SIM1.1@1563.49,3057.73 ; 1550.35,3026.02 cw(c1595.2,3026.02) SIM1.1@1563.49,3057.73 ; 1550.35,3026.02 cw(c1595.2,3026.02) SIM1.1@1563.49,3057.73 ; 1550.35,3026.02 cw(c1595.2,3026.02) SIM1.1@1563.49,3057.73 ; 1550.35,3026.02 cw(c1595.2,3026.02) SIM1.1@1563.49,3057.73 ; 1550.35,3026.02 cw(c1595.2,3026.02) SIM1.1@1563.49,3057.73 ; 1550.35,3026.02 cw(c1595.2,3026.02) SIM1.1@1563.49,3057.73 ; 1550.35,3026.02 cw(c1595.2,3026.02) SIM1.1@1563.49,3057.73 ; SIM1.1@1550.35,3050.17 cw(c1571.05,3050.17) SIM1.1@1556.42,3064.8 ; SIM1.1@1550.35,3050.17 cw(c1571.05,3050.17) SIM1.1@1556.42,3064.8 ; SIM1.1@1550.35,3050.17 cw(c1571.05,3050.17) SIM1.1@1556.42,3064.8 ; SIM1.1@1550.35,3050.17 cw(c1571.05,3050.17) SIM1.1@1556.42,3064.8 ; SIM1.1@1550.35,3050.17 cw(c1571.05,3050.17) SIM1.1@1556.42,3064.8 ; SIM1.1@1550.35,3050.17 cw(c1571.05,3050.17) SIM1.1@1556.42,3064.8 ; SIM1.1@1550.35,3050.17 cw(c1571.05,3050.17) SIM1.1@1556.42,3064.8 ; SIM1.1@1550.35,3050.17 cw(c1571.05,3050.17) SIM1.1@1556.42,3064.8 ; SIM1.1@1551.17,3056.29 cw(c1545.81,3047.58) 1554.67,3042.46 ; SIM1.1@1551.17,3056.29 cw(c1545.81,3047.58) 1554.67,3042.46 ; SIM1.1@1551.17,3056.29 cw(c1545.81,3047.58) 1554.67,3042.46 ; SIM1.1@1551.17,3056.29 cw(c1545.81,3047.58) 1554.67,3042.46 ; SIM1.1@1551.17,3056.29 cw(c1545.81,3047.58) 1554.67,3042.46 ; SIM1.1@1551.17,3056.29 cw(c1545.81,3047.58) 1554.67,3042.46 ; SIM1.1@1551.17,3056.29 cw(c1545.81,3047.58) 1554.67,3042.46 ; SIM1.1@1551.17,3056.29 cw(c1545.81,3047.58) 1554.67,3042.46 ; SIM1.1@1551.17,3056.29 cw(c1545.81,3047.58) 1554.67,3042.46 ; SIM1.1@1551.17,3056.29 cw(c1545.81,3047.58) 1554.67,3042.46 ; SIM1.1@1551.17,3056.29 cw(c1545.81,3047.58) 1554.67,3042.46 ; SIM1.1@1551.17,3056.29 cw(c1545.81,3047.58) 1554.67,3042.46 ; SIM1.1@1551.17,3056.29 cw(c1545.81,3047.58) 1554.67,3042.46 ; SIM1.1@1551.17,3056.29 cw(c1545.81,3047.58) 1554.67,3042.46 ; SIM1.1@1551.17,3056.29 cw(c1545.81,3047.58) 1554.67,3042.46 ; SIM1.1@1551.17,3056.29 cw(c1545.81,3047.58) 1554.67,3042.46 ; SIM1.1@1551.17,3056.29 cw(c1545.81,3047.58) 1554.67,3042.46 ; SIM1.1@1551.17,3056.29 cw(c1545.81,3047.58) 1554.67,3042.46 ; SIM1.1@1551.17,3056.29 cw(c1545.81,3047.58) 1554.67,3042.46 ; SIM1.1@1551.17,3056.29 cw(c1545.81,3047.58) 1554.67,3042.46 ; SIM1.1@1551.17,3056.29 cw(c1545.81,3047.58) 1554.67,3042.46 ; SIM1.1@1551.17,3056.29 cw(c1545.81,3047.58) 1554.67,3042.46 ; SIM1.1@1551.17,3056.29 cw(c1545.81,3047.58) 1554.67,3042.46 ; SIM1.1@1551.17,3056.29 cw(c1545.81,3047.58) 1554.67,3042.46 ; SIM1.1@1551.17,3056.29 cw(c1545.81,3047.58) 1554.67,3042.46 ; SIM1.1@1551.17,3056.29 cw(c1545.81,3047.58) 1554.67,3042.46 ; SIM1.1@1551.17,3056.29 cw(c1545.81,3047.58) 1554.67,3042.46 ; SIM1.1@1551.17,3056.29 cw(c1545.81,3047.58) 1554.67,3042.46 ; C12.1@1557.43,2862.72 cw(c1587.08,2833.06) 1587.08,2875 ; C12.1@1557.43,2862.72 cw(c1587.08,2833.06) 1587.08,2875 ; C12.1@1557.43,2862.72 cw(c1587.08,2833.06) 1587.08,2875 ; C12.1@1557.43,2862.72 cw(c1587.08,2833.06) 1587.08,2875 ; C12.1@1557.43,2862.72 cw(c1587.08,2833.06) 1587.08,2875 ; 1625.76,2875 cw(c1625.76,2858.56) U4.5@1637.39,2870.18 ; 1625.76,2875 ccw(c1625.76,2891.44) U4.5@1637.39,2879.82 ; 1625.76,2875 cw(c1625.76,2858.56) U4.5@1637.39,2870.18 ; 1625.76,2875 ccw(c1625.76,2891.44) U4.5@1637.39,2879.82 ; 1625.76,2875 cw(c1625.76,2858.56) U4.5@1637.39,2870.18 ; 1625.76,2875 ccw(c1625.76,2891.44) U4.5@1637.39,2879.82 ; 1625.76,2875 cw(c1625.76,2858.56) U4.5@1637.39,2870.18 ; 1625.76,2875 ccw(c1625.76,2891.44) U4.5@1637.39,2879.82 ; 1625.76,2875 cw(c1625.76,2858.56) U4.5@1637.39,2870.18 ; 1625.76,2875 ccw(c1625.76,2891.44) U4.5@1637.39,2879.82 ; 1625.76,2875 cw(c1625.76,2858.56) U4.5@1637.39,2870.18 ; 1625.76,2875 ccw(c1625.76,2891.44) U4.5@1637.39,2879.82 ; 1625.76,2875 cw(c1625.76,2858.56) U4.5@1637.39,2870.18 ; 1625.76,2875 ccw(c1625.76,2891.44) U4.5@1637.39,2879.82 ; 1625.76,2875 cw(c1625.76,2858.56) U4.5@1637.39,2870.18 ; 1625.76,2875 ccw(c1625.76,2891.44) U4.5@1637.39,2879.82
SPI1_CS: J9.4 U12.93 | length 2235.4
  Top Layer w10: J9.4@1319,2487 1319,2554.68 cw(c1371.32,2554.68) 1371.32,2607 2230.57,2607 cw(c2230.57,2572) 2265.57,2572 U12.93@2265.57,2141.21 ; J9.4@1301.66,2504.34 ccw(c1259.79,2546.21) 1319,2546.21 ; J9.4@1301.66,2504.34 ccw(c1259.79,2546.21) 1319,2546.21 ; J9.4@1301.66,2504.34 ccw(c1259.79,2546.21) 1319,2546.21 ; J9.4@1301.66,2504.34 ccw(c1259.79,2546.21) 1319,2546.21 ; J9.4@1301.66,2504.34 ccw(c1259.79,2546.21) 1319,2546.21 ; J9.4@1308.73,2497.27 ccw(c1283.93,2522.07) 1319,2522.07 ; J9.4@1308.73,2497.27 ccw(c1283.93,2522.07) 1319,2522.07 ; J9.4@1308.73,2497.27 ccw(c1283.93,2522.07) 1319,2522.07 ; J9.4@1308.73,2497.27 ccw(c1283.93,2522.07) 1319,2522.07 ; J9.4@1308.73,2497.27 ccw(c1283.93,2522.07) 1319,2522.07 ; 1319,2522.07 ccw(c1354.07,2522.07) J9.4@1329.27,2497.27 ; 1319,2522.07 ccw(c1354.07,2522.07) J9.4@1329.27,2497.27 ; 1319,2522.07 ccw(c1354.07,2522.07) J9.4@1329.27,2497.27 ; 1319,2522.07 ccw(c1354.07,2522.07) J9.4@1329.27,2497.27 ; 1319,2522.07 ccw(c1354.07,2522.07) J9.4@1329.27,2497.27 ; 1319,2546.21 ccw(c1378.21,2546.21) J9.4@1336.34,2504.34 ; 1319,2546.21 ccw(c1378.21,2546.21) J9.4@1336.34,2504.34 ; 1319,2546.21 ccw(c1378.21,2546.21) J9.4@1336.34,2504.34 ; 1319,2546.21 ccw(c1378.21,2546.21) J9.4@1336.34,2504.34 ; 1319,2546.21 ccw(c1378.21,2546.21) J9.4@1336.34,2504.34
SPI1_MISO: J9.6 U12.90 | length 1223.9
  Top Layer w10: v1(2300,2440) 2307.63,2440 cw(c2307.63,2423) 2324.63,2423 U12.90@2324.63,2141.21
  Bottom Layer w10: J9.6@1419,2487 ccw(c1466,2487) 1466,2440 v1(2300,2440)
SPI1_MOSI: J9.7 U12.91 | length 1064.1
  Top Layer w10: v2(2292,2387) cw(c2292,2374.06) 2304.94,2374.06 U12.91@2304.94,2141.21
  Bottom Layer w10: J9.7@1519,2387 v2(2292,2387) ; 2279.93,2387 cw(c2279.93,2374.93) 2288.46,2383.46 ccw(c2279.93,2374.93) 2279.93,2387 ; 2279.93,2387 ccw(c2279.93,2399.07) 2288.46,2390.54 cw(c2279.93,2399.07) 2279.93,2387
SPI1_SCK: J9.5 U12.89 | length 1634.8
  Top Layer w10: 2343.64,2308.71 cw(c2350.29,2304.86) v2@2352.54,2312.22 ; U12.89@2344.32,2141.21 2344.32,2307.32 cw(c2354,2307.32) v2(2354,2317) ; 2347.25,2295.65 ccw(c2326.25,2307.77) v2@2349.26,2315.42 ; 2344.32,2281.55 cw(c2389.45,2281.55) 2357.54,2313.46 ccw(c2389.45,2281.55) 2344.32,2281.55 ; 2344.31,2305.69 cw(c2365.31,2305.69) 2350.46,2320.54 ccw(c2365.31,2305.69) 2344.31,2305.69
  Bottom Layer w10: J9.5@1419,2387 1419,2362.81 ccw(c1464.81,2362.81) 1464.81,2317 v2(2354,2317) ; J9.5@1410.01,2364.18 cw(c1402.49,2345.06) 1422.33,2350.38 ; J9.5@1410.01,2364.18 cw(c1402.49,2345.06) 1422.33,2350.38 ; J9.5@1410.01,2364.18 cw(c1402.49,2345.06) 1422.33,2350.38 ; J9.5@1410.01,2364.18 cw(c1402.49,2345.06) 1422.33,2350.38 ; J9.5@1410.01,2364.18 cw(c1402.49,2345.06) 1422.33,2350.38 ; 1422.33,2350.38 cw(c1434.1,2353.54) J9.5@1429.09,2364.64 ; 1422.33,2350.38 cw(c1434.1,2353.54) J9.5@1429.09,2364.64 ; 1422.33,2350.38 cw(c1434.1,2353.54) J9.5@1429.09,2364.64 ; 1422.33,2350.38 cw(c1434.1,2353.54) J9.5@1429.09,2364.64 ; 1422.33,2350.38 cw(c1434.1,2353.54) J9.5@1429.09,2364.64 ; 2341.93,2317 cw(c2341.93,2304.93) v2@2350.46,2313.46 ; 2341.93,2317 ccw(c2341.93,2329.07) v2@2350.46,2320.54 ; 2341.93,2317 cw(c2341.93,2304.93) v2@2350.46,2313.46 ; 2341.93,2317 ccw(c2341.93,2329.07) v2@2350.46,2320.54 ; 2341.93,2317 cw(c2341.93,2304.93) v2@2350.46,2313.46 ; 2341.93,2317 ccw(c2341.93,2329.07) v2@2350.46,2320.54 ; 2341.93,2317 cw(c2341.93,2304.93) v2@2350.46,2313.46 ; 2341.93,2317 ccw(c2341.93,2329.07) v2@2350.46,2320.54 ; 2341.93,2317 cw(c2341.93,2304.93) v2@2350.46,2313.46 ; 2341.93,2317 ccw(c2341.93,2329.07) v2@2350.46,2320.54 ; 2341.93,2317 cw(c2341.93,2304.93) v2@2350.46,2313.46 ; 2341.93,2317 ccw(c2341.93,2329.07) v2@2350.46,2320.54 ; 2341.93,2317 cw(c2341.93,2304.93) v2@2350.46,2313.46 ; 2341.93,2317 ccw(c2341.93,2329.07) v2@2350.46,2320.54 ; 2341.93,2317 cw(c2341.93,2304.93) v2@2350.46,2313.46 ; 2341.93,2317 ccw(c2341.93,2329.07) v2@2350.46,2320.54
SPI2_CS: OLED.7
SPI2_MISO: OLED.6 U12.53 | length 1447.8
  Top Layer w10: U12.53@2663.21,1645.15 3392.15,1645.15 ccw(c3392.15,1652) OLED.6@3399,1652 ; 3317.11,1645.15 ccw(c3317.11,1728.89) OLED.6@3376.32,1669.68 ; 3317.11,1645.15 ccw(c3317.11,1728.89) OLED.6@3376.32,1669.68 ; 3317.11,1645.15 ccw(c3317.11,1728.89) OLED.6@3376.32,1669.68 ; 3317.11,1645.15 ccw(c3317.11,1728.89) OLED.6@3376.32,1669.68 ; 3317.11,1645.15 ccw(c3317.11,1728.89) OLED.6@3376.32,1669.68 ; 3341.25,1645.15 ccw(c3341.25,1704.75) OLED.6@3383.39,1662.61 ; 3341.25,1645.15 ccw(c3341.25,1704.75) OLED.6@3383.39,1662.61 ; 3341.25,1645.15 ccw(c3341.25,1704.75) OLED.6@3383.39,1662.61 ; 3341.25,1645.15 ccw(c3341.25,1704.75) OLED.6@3383.39,1662.61 ; 3341.25,1645.15 ccw(c3341.25,1704.75) OLED.6@3383.39,1662.61 ; 3350.18,1645.15 cw(c3350.18,1608.18) OLED.6@3376.32,1634.32 ; 3350.18,1645.15 cw(c3350.18,1608.18) OLED.6@3376.32,1634.32 ; 3350.18,1645.15 cw(c3350.18,1608.18) OLED.6@3376.32,1634.32 ; 3350.18,1645.15 cw(c3350.18,1608.18) OLED.6@3376.32,1634.32 ; 3350.18,1645.15 cw(c3350.18,1608.18) OLED.6@3376.32,1634.32
SPI2_MOSI: OLED.4 U12.54 | length 1558
  Top Layer w10: U12.54@2663.21,1664.83 3291.83,1664.83 ccw(c3291.83,1692) 3319,1692 3319,1832 cw(c3339,1832) 3339,1852 ; OLED.4@3399,1852 3339,1852 ; 3339,1852 cw(c3339,1804.01) OLED.4@3375.16,1835.56 ; 3339,1852 ccw(c3339,1899.99) OLED.4@3375.16,1868.44 ; 3339,1852 cw(c3339,1804.01) OLED.4@3375.16,1835.56 ; 3339,1852 ccw(c3339,1899.99) OLED.4@3375.16,1868.44 ; 3339,1852 cw(c3339,1804.01) OLED.4@3375.16,1835.56 ; 3339,1852 ccw(c3339,1899.99) OLED.4@3375.16,1868.44 ; 3339,1852 cw(c3339,1804.01) OLED.4@3375.16,1835.56 ; 3339,1852 ccw(c3339,1899.99) OLED.4@3375.16,1868.44 ; 3339,1852 cw(c3339,1804.01) OLED.4@3375.16,1835.56 ; 3339,1852 ccw(c3339,1899.99) OLED.4@3375.16,1868.44 ; 3361,1852 cw(c3361,1823.2) OLED.4@3382.7,1842.14 ; 3361,1852 ccw(c3361,1880.8) OLED.4@3382.7,1861.86 ; 3361,1852 cw(c3361,1823.2) OLED.4@3382.7,1842.14 ; 3361,1852 ccw(c3361,1880.8) OLED.4@3382.7,1861.86 ; 3361,1852 cw(c3361,1823.2) OLED.4@3382.7,1842.14 ; 3361,1852 ccw(c3361,1880.8) OLED.4@3382.7,1861.86 ; 3361,1852 cw(c3361,1823.2) OLED.4@3382.7,1842.14 ; 3361,1852 ccw(c3361,1880.8) OLED.4@3382.7,1861.86 ; 3361,1852 cw(c3361,1823.2) OLED.4@3382.7,1842.14 ; 3361,1852 ccw(c3361,1880.8) OLED.4@3382.7,1861.86